# Altium PCB 激光昆虫蓝牙版  - 双面板 板厚1.0mm本.PcbDoc (part 2 of 2)
Units mil, origin at the board's own origin, x right, y up, seen from the top; angles counter-clockwise.
Board outline 2129 x 2216 mil, 3 copper layers (Top Layer, Mid-Layer 14, Bottom Layer); 82 components, 45 nets, 210 pads, 156 vias.
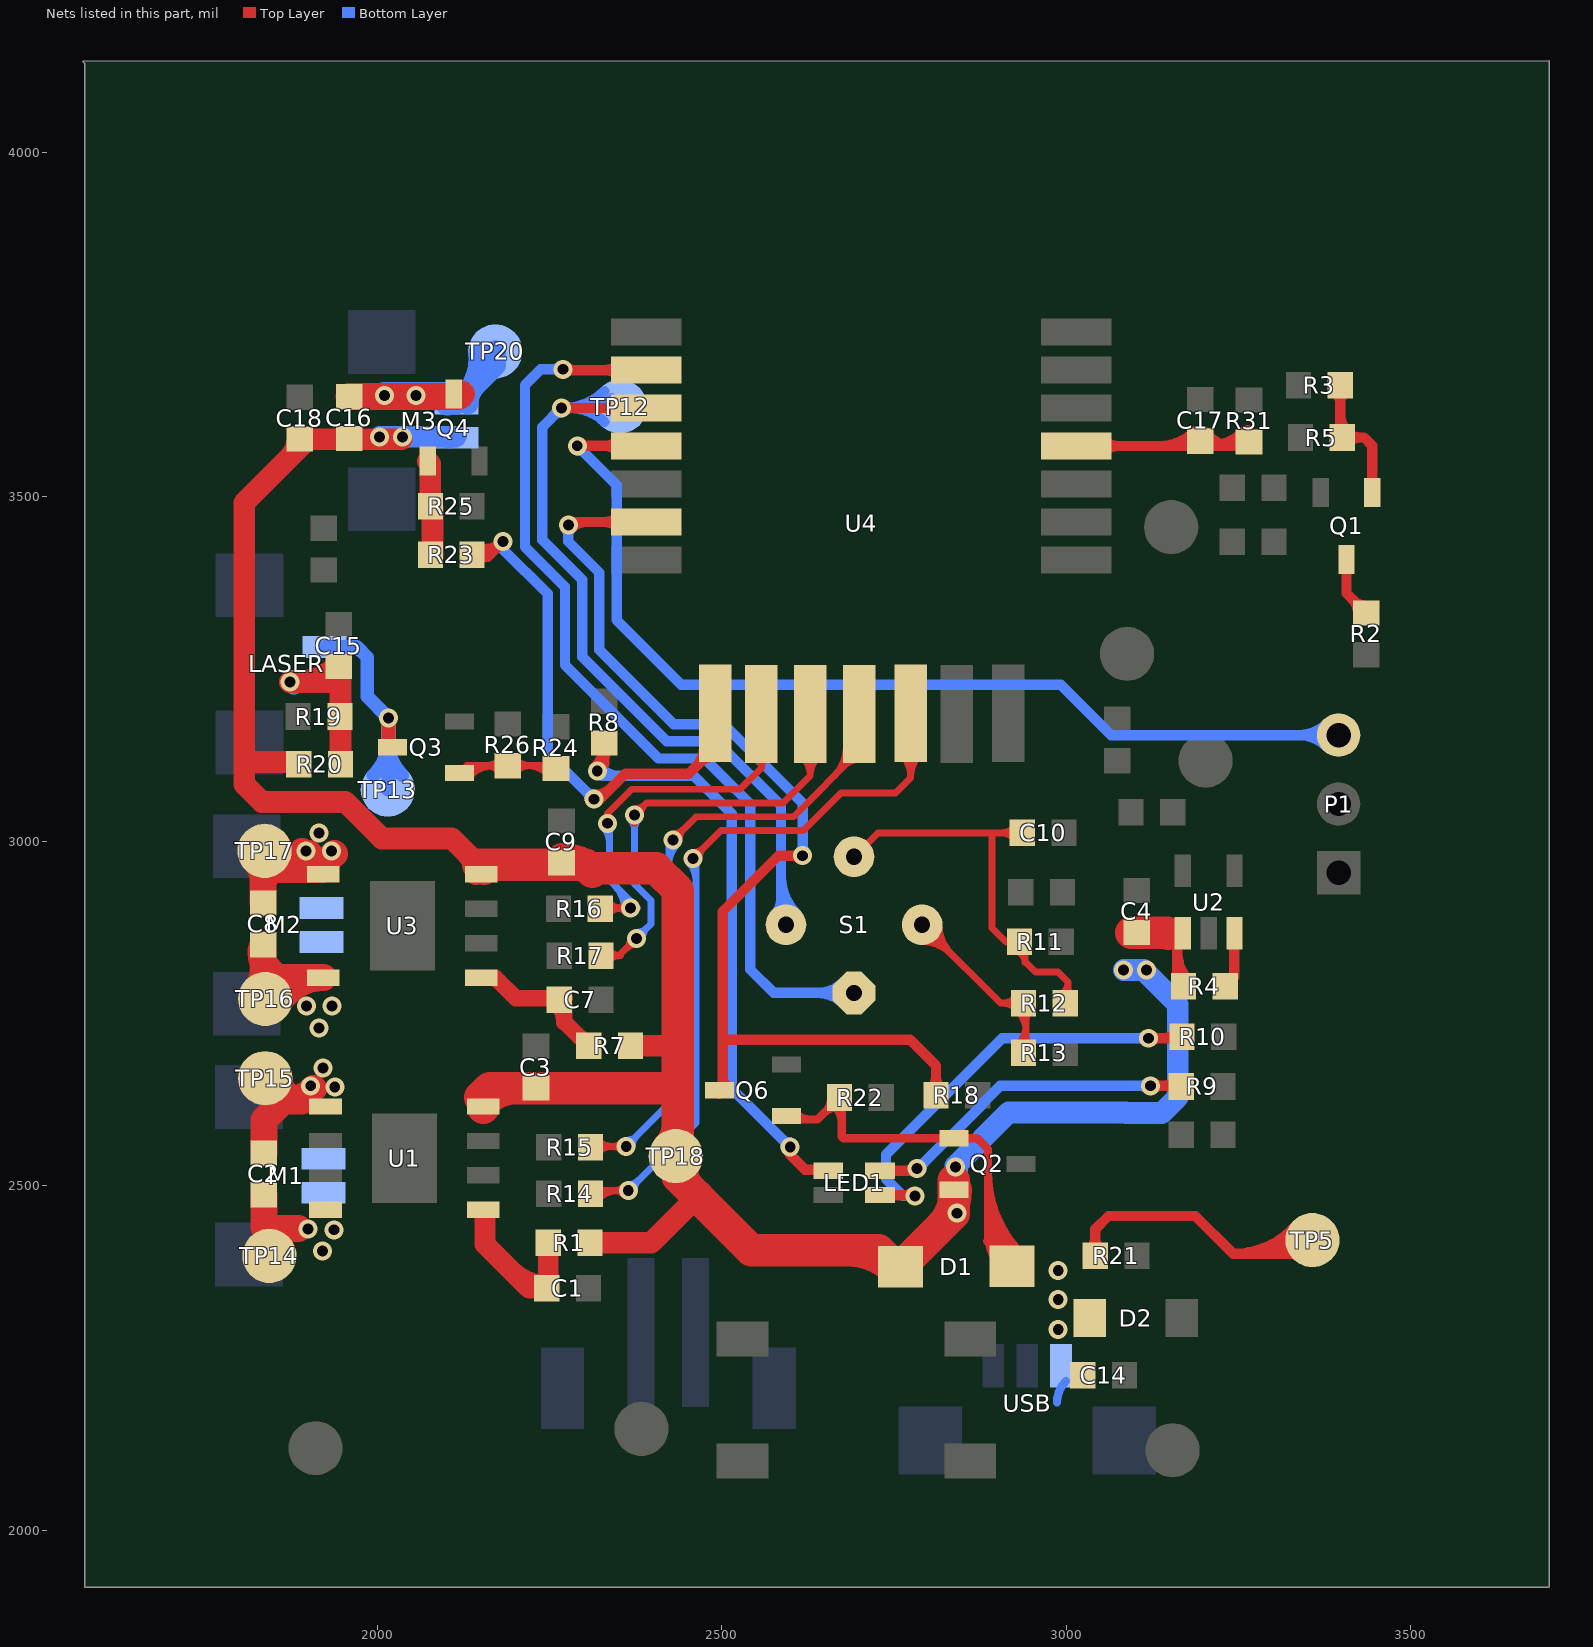
[diagram p2: the nets of this part, all layers, seen from the top]

## Via types
v1: diameter 27.56, hole 15.75, Top Layer to Bottom Layer, tented both sides, 156 vias

## Nets (pads, with @x,y where several pads share a name; then routed paths per layer and width w, separated by ;. In a path a pad name is that pad's centre, name@x,y a point inside that pad or via, vN(x,y) a via of type N, cw(c..) or ccw(c..) an arc to the next point about the centre after c; other vN are vias at no path point) (continued)
M3: R23.2 U4.8 | length 979.4
  Top Layer w15: R23.2@2135.71,3413.11 ccw(c2146.42,3438.88) 2166.15,3419.15 ; R23.2@2140.32,3413 2160,3413 ; R23.2@2141.46,3426.96 ccw(c2155.73,3461.27) v1(2182,3435) 2160,3413 ; R23.2@2144.96,3407.37 cw(c2158.54,3393.79) 2158.54,3413 ; R23.2@2146.58,3420.59 ccw(c2160,3428.67) 2160,3413 ; v1@2175.72,3435 cw(c2160.56,3435) 2171.28,3424.28 cw(c2182,3413.56) v1@2182,3428.72 ; v1@2314,3067.28 ccw(c2314,3103.92) 2339.91,3078.01 ; v1@2318,3058 2319.9,3058 2359.9,3098 2452,3098 2490.43,3136.43 U4.8@2490.43,3185.94 ; 2461.3,3107.3 ccw(c2429.91,3138.69) U4.8@2474.3,3138.69 ; 2466.77,3112.77 cw(c2490.43,3089.12) U4.8@2490.43,3122.57
  Bottom Layer w15: v1(2182,3435) 2182,3424 2247,3359 2247,3128 v1(2314,3061) ; v1@2307.72,3061 ccw(c2292.56,3061) 2303.28,3071.72 ccw(c2314,3082.44) v1@2314,3067.28
NetC1_1: C1.1 R1.2 U1.1 | length 277.9
  Top Layer w30: 2156,2453 2156,2415 2220,2351 C1.1@2245.68,2351 2247.68,2353 R1.2@2247.68,2417 ; 2194.51,2376.49 ccw(c2245.68,2427.66) C1.1@2245.68,2355.29
NetC7_1: C7.1 R7.2 U3.1 | length 281.3
  Top Layer w23.62: U3.1@2150.5,2802 2171,2802 2201,2772 C7.1@2271.68,2772 ; U3.1@2162.31,2802 cw(c2162.31,2781.02) 2177.14,2795.86 ; C7.1@2259.25,2764.26 cw(c2233.87,2737.03) 2271.1,2737.03 ; C7.1@2263.68,2770 2271.1,2762.58 2271.1,2737.9 2306,2703 R7.2@2306.68,2703 ; R7.2@2292.75,2716.25 ccw(c2306.68,2730.19) R7.2@2306.68,2710.48
NetC10_1: C10.1 R11.2 R12.1 S1.3 | length 713.8
  Top Layer w10: S1.3@2691.63,2977.48 2726.15,3012 2892,3012 ; R11.2@2919.34,2849.04 ccw(c2912,2846.1) 2912,2854 ; R11.2@2919.34,2858.96 cw(c2912,2861.9) 2912,2854 ; C10.1@2926.27,3002.59 ccw(c2903.56,2979.87) 2903.56,3012 ccw(c2903.56,3044.13) C10.1@2926.27,3021.41 ; R11.2@2927.78,2840.29 cw(c2922.83,2824.18) 2939.68,2824.18 ; C10.1@2935.68,3012 2892,3012 ; R12.1@2991.75,2777.56 ccw(c2981.48,2795.68) 3002.31,2795.68 ; R12.1@3002.31,2765 3002.31,2795.69 ; 3002.31,2788.45 ccw(c3020.78,2788.45) R12.1@3007.72,2775.39 ; 2892,3012 2892,2874 2912,2854 ; 2912,2854 2939.68,2854 2939.68,2825.32 2955,2810 2988,2810 3002.31,2795.69
NetC15_2: C15.2 LASER.1 R19.2 R20.2 | length 388.5
  Top Layer w31.5: v1(1873,3231) 1946.32,3231 ; v1@1882.07,3231 ccw(c1882.07,3314.63) C15.2@1941.21,3255.5 ; C15.2@1944,3253.69 1946.32,3251.37 1946.32,3231 ; R20.2@1946.32,3112 1946.32,3231
  Bottom Layer w31.5: v1@1874.82,3231 1876.64,3232.82 LASER.1@1922.87,3232.82 ; v1@1878.23,3229.04 cw(c1899.21,3180.17) 1906.73,3232.82 ccw(c1901.14,3174.6) v1@1878.45,3228.51
NetC16_1: C16.1 M3.2 Q4.3 TP20.1 | length 481.2
  Top Layer w39.37: C16.1@1959,3645.32 2117.86,3645.32 Q4.3@2121.48,3648.94
  Bottom Layer w31.5: M3.2@2114.87,3635.03 2171,3691.16 TP20.1@2171,3711 ; M3.2@2124.8,3644.95 ccw(c2069.03,3700.72) TP20.1@2147.5,3708.63 ; M3.2@2131.01,3635.03 cw(c2169.98,3635.03) 2142.43,3662.59
  Bottom Layer w39.37: v1(2010,3647) M3.2@2102.9,3647 ; 2079.34,3647 cw(c2079.34,3615.64) M3.2@2101.51,3637.81
  other v1: 2056,3647
NetCN6_2: LASER.2 Q3.3 TP13.1 | length 442
  Top Layer w20: Q3.3@2011.53,3137.76 ccw(c2000.74,3148.55) 2016,3148.55 ; v1(2016,3179) 2016,3142.54 Q3.3@2022.06,3136.48
  Bottom Layer w20: LASER.2@1922.87,3282.03 1969.97,3282.03 1985,3267 1985,3210 v1(2016,3179) 2016,3076 TP13.1@2015,3075 ; TP13.1@1994.23,3095.77 ccw(c1941.68,3148.32) 2016,3148.32 ; 2016,3143.49 ccw(c2083.49,3143.49) TP13.1@2035.77,3095.77
NetLED1_2: LED1.2 R10.2 | length 776.7
  Top Layer w15: LED1.2@2729.13,2486.3 2780.7,2486.3 v1@2781,2486 ; 2765.12,2486.3 cw(c2765.12,2470.12) v1@2776.56,2481.56 ; v1@2766.56,2486.3 ccw(c2766.56,2500.44) v1@2776.56,2490.44 ; v1(3119,2714) 3165.68,2714 R10.2@3167.68,2716 ; v1@3123.44,2709.56 cw(c3134.16,2698.84) 3134.16,2714 cw(c3134.16,2729.16) v1@3123.44,2718.44 ; 3139.14,2714 ccw(c3139.14,2743.56) R10.2@3160.04,2722.66 ; 3144.05,2714 cw(c3144.05,2691.38) R10.2@3160.04,2707.37
  Bottom Layer w15: v1@2776.56,2481.56 ccw(c2765.84,2470.84) 2765.84,2486 ccw(c2765.84,2501.16) v1@2776.56,2490.44 ; v1@2781,2486 2762,2486 2738,2510 2738,2545 2907,2714 v1(3119,2714) ; v1@3114.56,2709.56 ccw(c3103.84,2698.84) 3103.84,2714 ccw(c3103.84,2729.16) v1@3114.56,2718.44
  other v1: 2780,2485
NetLED1_3: LED1.3 R9.2 | length 617.4
  Top Layer w15: LED1.3@2729.13,2521.7 2781.7,2521.7 v1@2783,2523 ; 2764.7,2521.7 ccw(c2764.7,2541.3) v1@2778.56,2527.44 ; v1(3122,2645) 3165.68,2645 R9.2@3166.68,2644 ; v1@3126.44,2640.56 cw(c3137.16,2629.84) 3137.16,2645 cw(c3137.16,2660.16) v1@3126.44,2649.44 ; 3140.56,2645 cw(c3140.56,2618.86) R9.2@3159.04,2637.34 ; 3140.63,2645 ccw(c3140.63,2671.04) R9.2@3159.04,2652.63
  Bottom Layer w15: v1@2783,2523 2877,2617 2877,2618 2904,2645 v1(3122,2645) ; v1@2783,2529.28 ccw(c2783,2544.44) 2793.72,2533.72 ccw(c2804.44,2523) v1@2789.28,2523 ; v1@3117.56,2640.56 ccw(c3106.84,2629.84) 3106.84,2645 ccw(c3106.84,2660.16) v1@3117.56,2649.44
  other v1: 2783,2525
NetLED1_4: LED1.4 R8.2 | length 1006.5
  Top Layer w15: v1@2314.56,3106.44 ccw(c2279.7,3141.3) R8.2@2329,3141.3 ; v1(2319,3102) 2329,3112 R8.2@2329,3142.68 ; R8.2@2321.36,3135.04 cw(c2302.91,3116.59) 2329,3116.59 cw(c2355.09,3116.59) R8.2@2336.64,3135.04 ; v1(2599,2556) 2599,2545 2621,2523 2653.03,2523 LED1.4@2654.33,2521.7 ; 2630.96,2523 cw(c2630.96,2508.18) LED1.4@2641.44,2518.66
  Bottom Layer w15: v1(2319,3102) 2326,3095 2459,3095 2514.28,3039.72 2514.28,2640.72 v1(2599,2556) ; v1@2323.44,3106.44 ccw(c2351.06,3134.06) 2351.06,3095 ; v1@2592.72,2556 ccw(c2577.56,2556) 2588.28,2566.72 ccw(c2599,2577.44) v1@2599,2562.28
NetQ1_1: Q1.1 R3.1 R5.2 | length 316.5
  Top Layer w15: R3.1@3389.67,3653.37 cw(c3371.22,3634.93) 3397.31,3634.93 cw(c3423.4,3634.93) R3.1@3404.96,3653.37 ; R5.2@3392.67,3594.63 ccw(c3381.47,3605.83) 3397.31,3605.83 ; 3397.31,3620.32 ccw(c3433.65,3620.32) R5.2@3407.96,3594.63 ; R3.1@3397.31,3662 3397.31,3589 R5.2@3400.32,3586 3432,3586 3443.92,3574.08 Q1.1@3443.92,3506.31 ; R5.2@3407.96,3578.36 cw(c3426.41,3559.91) 3426.41,3586 cw(c3426.41,3612.09) R5.2@3407.96,3593.64
NetQ1_3: Q1.3 R2.2 | length 130.5
  Top Layer w15: Q1.3@3406.52,3409.06 3406.52,3359.8 R2.2@3435,3331.32 ; 3414.87,3351.44 cw(c3394.74,3331.32) R2.2@3423.21,3331.32 ; R2.2@3417.25,3349.07 ccw(c3434.02,3365.84) R2.2@3434.02,3342.12
NetQ3_1: Q3.1 R24.1 R26.2 | length 367.4
  Top Layer w10: Q3.1@2119.31,3099.08 2129.9,3109.67 2262.98,3109.67 R24.1@2266,3112.69 ; Q3.1@2126.3,3101.33 cw(c2146.43,3081.21) 2146.43,3109.67 ; Q3.1@2133.38,3094.26 cw(c2170.57,3057.07) R26.2@2170.57,3109.67 ; 2155.85,3109.67 ccw(c2155.85,3141.85) R26.2@2178.61,3119.09 ; 2155.93,3109.67 cw(c2155.93,3077.59) R26.2@2178.61,3100.27 ; R26.2@2199.39,3100.27 cw(c2222.07,3077.59) 2222.07,3109.67 ; R26.2@2199.39,3119.09 ccw(c2222.15,3141.85) 2222.15,3109.67 ; 2216.27,3109.67 cw(c2216.27,3063.94) R24.1@2248.61,3096.28 ; 2235.51,3109.67 ccw(c2235.51,3128.2) R24.1@2248.61,3115.1
NetQ4_1: Q4.1 R23.1 R25.2 | length 141.4
  Top Layer w31.5: Q4.1@2073.08,3551.69 2076.68,3548.09 R25.2@2076.68,3486 2079.69,3483 R23.1@2079.69,3413
NetR4_2: R4.2 U2.3 | length 82.4
  Top Layer w15: R4.2@3230.39,2789.62 3243.8,2803.04 U2.3@3243.8,2866.45
NetR12_2: R12.2 R13.1 S1.2 | length 806.5
  Top Layer w10: 2853.11,2816 S1.2@2790.46,2878.65 2904.11,2765 2941.68,2765 R13.1@2941.68,2693 ; R12.2@2928.27,2754.61 cw(c2895.9,2722.23) 2941.68,2722.23 ; R12.2@2928.27,2755.59 ccw(c2905.56,2732.87) 2905.56,2765 ccw(c2905.56,2797.13) R12.2@2928.27,2774.41 ; R13.1@2928.28,2703.39 ccw(c2895.91,2735.76) 2941.68,2735.76 ; 2941.68,2716.46 ccw(c2960.16,2716.46) R13.1@2947.1,2703.39 ; 2941.68,2741.55 cw(c2960.15,2741.55) R12.2@2947.09,2754.61 ; 2815.26,2853.85 cw(c2840.06,2878.65) 2804.98,2878.65 ccw(c2840.06,2878.65) 2815.26,2853.85 ; 2815.26,2853.85 ccw(c2790.46,2829.05) 2790.46,2864.12 cw(c2790.46,2829.05) 2815.26,2853.85 ; 2832.33,2836.78 cw(c2874.2,2878.65) 2814.98,2878.65 ccw(c2874.2,2878.65) 2832.33,2836.78 ; 2832.33,2836.78 ccw(c2790.46,2794.91) 2790.46,2854.12 cw(c2790.46,2794.91) 2832.33,2836.78
NetR14_1: R14.1 U4.12 | length 1288.7
  Top Layer w10: R14.1@2309.31,2488 2314.31,2493 v1(2364,2493) ; R14.1@2318.72,2479.57 cw(c2351.14,2447.16) v1@2351.14,2493 ; R14.1@2318.72,2498.39 ccw(c2331.75,2511.42) 2331.75,2493 ; v1@2357.79,2486.79 ccw(c2342.8,2471.8) 2342.8,2493 ccw(c2342.8,2514.2) v1@2357.79,2499.21 ; v1(2458,2975) 2498.5,3015.5 2618.5,3015.5 2673,3070 2752,3070 2773.89,3091.89 U4.12@2773.89,3185.94 ; v1@2458,2983.78 ccw(c2458,3004.98) 2472.99,2989.99 ccw(c2487.98,2975) v1@2466.78,2975 ; U4.12@2760.72,3125.53 cw(c2728.93,3093.74) 2773.89,3093.74 cw(c2818.85,3093.74) U4.12@2787.06,3125.53
  Bottom Layer w10: v1(2364,2493) 2462,2591 2462,2972 v1@2458,2976 ; v1@2364,2501.78 ccw(c2364,2522.98) 2378.99,2507.99 ccw(c2393.98,2493) v1@2372.78,2493 ; v1@2451.79,2968.79 cw(c2427.15,2944.15) 2462,2944.15
NetR15_1: R15.1 U4.11 | length 1203.2
  Top Layer w10: R15.1@2309.31,2556 2310.31,2557 v1(2361,2557) ; R15.1@2318.72,2547.57 cw(c2341.48,2524.82) 2341.48,2557 ; R15.1@2318.72,2566.39 ccw(c2341.4,2589.07) 2341.4,2557 ; v1@2354.79,2550.79 ccw(c2339.8,2535.8) 2339.8,2557 ccw(c2339.8,2578.2) v1@2354.79,2563.21 ; v1(2429,3002) 2462.5,3035.5 2603.5,3035.5 2699.02,3131.02 U4.11@2699.02,3184.61 ; v1@2429,3010.78 ccw(c2429,3031.98) 2443.99,3016.99 ccw(c2458.98,3002) v1@2437.78,3002 ; 2662.75,3094.75 ccw(c2620.14,3137.36) U4.11@2680.4,3137.36 ; 2678.05,3110.05 cw(c2699.02,3089.09) U4.11@2699.02,3118.74 ; 2679.82,3111.82 ccw(c2654.28,3137.36) U4.11@2690.4,3137.36
  Bottom Layer w10: v1@2360.22,2557.78 v1(2361,2557) 2442,2638 2442,2932.34 2423,2951.34 2423,3005 v1@2422,3006 ; v1@2361,2565.78 ccw(c2361,2586.98) 2375.99,2571.99 ccw(c2390.98,2557) v1@2369.78,2557 ; 2423,2966.32 cw(c2464.68,2966.32) v1@2435.21,2995.79
NetR16_1: R16.1 U4.9 | length 752.1
  Top Layer w10: v1@2330.04,3033.83 ccw(c2326.77,3040.28) 2334,3040.28 ; v1@2332,3024 v1(2334,3026) 2334,3040.28 ; R16.1@2332.72,2893.57 cw(c2355.48,2870.82) v1@2355.48,2903 ; R16.1@2332.72,2912.39 ccw(c2355.4,2935.07) v1@2355.4,2903 ; R16.1@2333.31,2902 2334.31,2903 v1@2377,2903 ; v1@2337.96,3033.83 cw(c2341.23,3040.28) 2334,3040.28 ; v1@2360.79,2896.79 ccw(c2345.8,2881.8) 2345.8,2903 ccw(c2345.8,2924.2) v1@2360.79,2909.21 ; U4.9@2548.51,3120.94 cw(c2540.68,3106.29) 2557.29,3106.29 ; U4.9@2557.29,3184.61 2557.29,3106.29 ; U4.9@2566.07,3120.94 ccw(c2573.9,3106.29) 2557.29,3106.29 ; 2334,3040.28 2369.22,3075.5 2526.5,3075.5 2557.29,3106.29
  Bottom Layer w10: v1@2327.79,3019.79 cw(c2306.77,2998.77) 2336.5,2998.77 ; v1(2334,3026) 2336.5,3023.5 2336.5,2943.5 v1@2377,2903 ; 2336.5,3010.84 cw(c2349.16,3010.84) v1@2340.21,3019.79 ; 2344.94,2935.06 cw(c2312.88,2903) v1@2358.22,2903 ; 2362.01,2917.99 cw(c2347.02,2903) v1@2368.22,2903
  other v1: 2367,2903
NetR17_1: R17.1 U4.10 | length 868.5
  Top Layer w10: R17.1@2324.31,2834 2353,2834 ; R17.1@2334.47,2825.41 cw(c2353,2809.74) 2353,2834 ; R17.1@2334.47,2842.59 ccw(c2353,2858.26) 2353,2834 ; v1@2367.22,2859 cw(c2346.02,2859) 2361.01,2844.01 cw(c2376,2829.02) v1@2376,2850.22 ; v1@2373,3026 v1(2373,3038) 2390.5,3055.5 2588.5,3055.5 2628.16,3095.16 ; v1@2373,3046.78 ccw(c2373,3067.98) 2387.99,3052.99 ccw(c2402.98,3038) v1@2381.78,3038 ; v1(2376,2859) 2353,2836 2353,2834 ; U4.10@2615.61,3123.61 cw(c2589.65,3095.16) 2628.16,3095.16 ; U4.10@2628.16,3184.61 2628.16,3095.16 ; U4.10@2640.71,3123.61 ccw(c2666.67,3095.16) 2628.16,3095.16
  Bottom Layer w10: v1@2366.79,3031.79 cw(c2351.8,3016.8) 2373,3016.8 cw(c2394.2,3016.8) v1@2379.21,3031.79 ; v1@2373,3026 2373,2937.7 2397,2913.7 2397,2880 v1(2376,2859) ; v1@2376,2867.78 ccw(c2376,2888.98) 2390.99,2873.99 ccw(c2405.98,2859) v1@2384.78,2859
OUT1A: C2.1 M1.1 TP14.1 U1.8 | length 190.8
  Top Layer w39.37: 1835,2464.84 ccw(c1909.84,2464.84) TP14.1@1856.92,2411.92 ; C2.1@1835,2486.68 1835,2447 ; TP14.1@1853.16,2414.86 cw(c1872.52,2447) 1835,2447 ; 1885,2438 1844,2438 1835,2447
  other v1: 1920,2405 1937,2436 1899,2437
OUT1B: C2.2 M1.2 TP15.1 U1.5 | length 214.2
  Top Layer w39.37: C2.2@1835,2547.31 1835,2595 1863,2623 1890,2623 cw(c1890,2656.31) TP15.1@1856.68,2656.12 ; 1864.14,2623 ccw(c1864.14,2683.86) v1@1907.18,2640.82
  other v1: 1938,2643 1903,2645 1921,2671
OUT2A: C8.1 M2.1 TP16.1 U3.8 | length 387.3
  Top Layer w39.37: C8.1@1833.74,2850.27 ccw(c1860.85,2837.52) 1839.67,2816.33 ; 1834,2825.77 ccw(c1891.77,2825.77) TP16.1@1850.92,2784.92 ; C8.1@1834,2849.68 1834,2822 ; TP16.1@1850.18,2785.62 cw(c1882.98,2822) 1834,2822 ; TP16.1@1854.37,2761.73 cw(c1921.5,2725.91) U3.8@1921.5,2802 1854,2802 1834,2822 ; TP16.1@1823.08,2784.92 ccw(c1796.72,2811.28) 1834,2811.28 cw(c1796.72,2811.28) TP16.1@1823.08,2784.92
  other v1: 1915,2729 1897,2761 1934,2761
OUT2B: C8.2 M2.2 TP17.1 U3.5 | length 509.1
  Top Layer w20: 1834,2944 TP17.1@1842,2952
  Top Layer w39.37: TP17.1@1822.08,2972.08 cw(c1793.3,2943.3) 1834,2943.3 ; TP17.1@1822.23,2971.93 cw(c1794.86,2943.95) 1834,2943.95 cw(c1865.92,2943.95) TP17.1@1847.41,2969.96 ; C8.2@1834,2910.31 1834,2944 ; 1834,2933.65 cw(c1888.35,2933.65) TP17.1@1849.92,2972.08 ; TP17.1@1842,2959 U3.5@1921.5,2959 ; TP17.1@1845.07,2959 ccw(c1845.07,3036.93) v1@1900.18,2981.82 ; TP17.1@1852.56,2996.64 ccw(c1921.5,3040.94) U3.5@1921.5,2959 ; 1882.07,2959 ccw(c1882.07,3036.93) v1@1937.18,2981.82 ; v1@1890.2,2984.89 ccw(c1921.5,2990.86) U3.5@1921.5,2959
  other v1: 1896,2986 1933,2986 1915,3012
PIR: S1.4 TP12.1 U4.3 | length 1551.5
  Top Layer w15: v1(2267,3629) 2267.24,3628.76 U4.3@2390,3628.76 ; v1@2271.44,3624.56 cw(c2281.59,3614.41) 2281.59,3628.76 ; v1@2271.44,3633.44 ccw(c2282.73,3644.73) 2282.73,3628.76 ; U4.3@2349.89,3620.15 ccw(c2329.09,3599.35) 2329.09,3628.76 ccw(c2329.09,3658.18) U4.3@2349.89,3637.38
  Bottom Layer w15: v1@2260.72,3629 cw(c2245.56,3629) 2256.28,3618.28 cw(c2267,3607.56) v1@2267,3622.72 ; v1@2270.23,3629 ccw(c2270.23,3712.77) TP12.1@2329.46,3653.54 ; v1@2271.44,3624.56 cw(c2282.16,3613.84) 2282.16,3629 cw(c2282.16,3644.16) v1@2271.44,3633.44 ; v1@2279.89,3629 cw(c2279.89,3558.89) TP12.1@2329.46,3608.46 ; 2306.44,3629 ccw(c2306.44,3676.56) TP12.1@2340.07,3642.93 ; TP12.1@2352,3631 2350,3629 v1(2267,3629) 2239,3601 2239,3437.71 2297,3379.71 2297,3267.64 2419.64,3145 2492,3145 2585.72,3051.28 2585.72,2885.73 S1.4@2592.8,2878.65 ; S1.4@2577.22,2894.23 ccw(c2556.71,2914.74) 2585.72,2914.74 ; 2585.72,2912.71 ccw(c2626.86,2912.71) S1.4@2597.77,2883.62 ; 2585.72,2948.92 ccw(c2663.07,2948.92) S1.4@2608.38,2894.23
PIR_CON: S1.1 U4.2 | length 1542
  Top Layer w15: v1(2269,3685) 2270.12,3683.88 U4.2@2390,3683.88 ; v1@2273.44,3689.44 ccw(c2286.86,3702.86) 2286.86,3683.88 ; U4.2@2349.89,3675.27 ccw(c2329.09,3654.46) 2329.09,3683.88 ccw(c2329.09,3713.3) U4.2@2349.89,3692.5
  Bottom Layer w15: v1@2264.56,3680.56 ccw(c2253.84,3669.84) 2253.84,3685 ccw(c2253.84,3700.16) v1@2264.56,3689.44 ; v1(2269,3685) 2237,3685 2214,3662 2214,3427.36 2272,3369.36 2272,3256 2408,3120 2475,3120 2499,3096 2541,3054 2541,2813.82 2575,2779.82 S1.1@2691.63,2779.82 ; S1.1@2676.05,2764.25 ccw(c2638.45,2726.65) 2638.45,2779.82 ccw(c2638.45,2833) S1.1@2676.05,2795.4
RESET: C17.2 R31.2 U4.18 | length 562.7
  Top Layer w15: U4.18@3013.98,3573.58 3239.9,3573.58 ; U4.18@3054.1,3564.97 cw(c3074.9,3544.17) 3074.9,3573.58 cw(c3074.9,3603) U4.18@3054.1,3582.2 ; 3135.29,3573.58 ccw(c3135.29,3644.41) C17.2@3185.37,3594.33 ; 3171.5,3573.58 ccw(c3171.5,3608.2) C17.2@3195.98,3583.72 ; C17.2@3179.06,3575.97 ccw(c3183.55,3578.99) C17.2@3183.55,3573.58 ; C17.2@3191.51,3584.34 ccw(c3211.72,3597.95) C17.2@3211.72,3573.58 ; C17.2@3203.95,3592.72 ccw(c3239.9,3616.91) 3239.9,3573.58 ; C17.2@3206.3,3573.58 ccw(c3206.3,3644.4) R31.2@3256.37,3594.33 ; 3242.51,3573.58 ccw(c3242.51,3608.19) R31.2@3266.98,3583.72 ; R31.2@3253.21,3586.78 cw(c3239.9,3586.89) 3239.9,3573.58 ; R31.2@3263,3596.68 3239.9,3573.58
SWS: P1.3 U4.4 | length 1678.7
  Top Layer w15: v1(2290,3574) 2389.52,3574 U4.4@2389.94,3573.58 ; v1@2294.44,3569.56 cw(c2305.16,3558.84) 2305.16,3574 cw(c2305.16,3589.16) v1@2294.44,3578.44 ; 2328.02,3574 cw(c2328.02,3543.16) U4.4@2349.82,3564.97 ; 2330.03,3574 ccw(c2330.03,3601.99) U4.4@2349.82,3582.2
  Bottom Layer w15: v1@2290,3567.72 cw(c2290,3552.56) 2300.72,3563.28 cw(c2311.44,3574) v1@2296.28,3574 ; v1(2290,3574) 2347,3517 2347,3321 2441,3227 2992,3227 3065,3154 P1.3@3395,3154 ; P1.3@3378.03,3137.03 ccw(c3337.07,3096.07) 3337.07,3154 ccw(c3337.07,3211.93) P1.3@3378.03,3170.97
USB_DEC: Q6.3 R18.2 U4.6 | length 1764.9
  Top Layer w15: v1(2277,3459) 2281.41,3463.41 U4.6@2390,3463.41 ; v1@2281.44,3454.56 cw(c2302.81,3433.19) 2302.81,3463.41 ; U4.6@2349.89,3454.79 ccw(c2329.09,3433.99) 2329.09,3463.41 ccw(c2329.09,3492.83) U4.6@2349.89,3472.03 ; Q6.3@2496.06,2633.48 2501,2638.42 2501,2712 ; 2501,2659.3 ccw(c2526.14,2659.3) Q6.3@2508.36,2641.53 ; v1@2612.56,2974.56 ccw(c2601.84,2963.84) 2601.84,2979 ccw(c2601.84,2994.16) v1@2612.56,2983.44 ; v1(2617,2979) 2582,2979 2501,2898 2501,2712 ; R18.2@2803.04,2639.63 ccw(c2784.59,2658.07) 2810.68,2658.07 ccw(c2836.77,2658.07) R18.2@2818.33,2639.63 ; R18.2@2810.68,2631 2810.68,2674.32 2773,2712 2501,2712
  Bottom Layer w15: v1@2272.56,3454.56 cw(c2261.84,3443.84) 2277,3443.84 cw(c2292.16,3443.84) v1@2281.44,3454.56 ; v1(2277,3459) 2277,3435.07 2322,3390.07 2322,3278 2430,3170 2502.36,3170 2617,3055.36 v1(2617,2979) ; v1@2612.56,2983.44 ccw(c2601.84,2994.16) 2617,2994.16 ccw(c2632.16,2994.16) v1@2621.44,2983.44
VBUS: C14.1 D1.1 D2.2 Q2.1 Q6.1 R21.2 R22.1 TP5.1 USB.1 | length 1885.5
  Top Layer w12: Q6.1@2593.31,2596.08 2638.76,2596.08 R22.1@2670.69,2628 2674,2624.69 2674,2571 2676.08,2568.92 Q2.1@2836.69,2568.92 2870.08,2568.92 2886,2553 2886,2418.06 D1.1@2921.06,2383 ; Q6.1@2606.67,2605.19 ccw(c2628.66,2627.18) 2628.66,2596.08 ; 2648,2605.31 cw(c2670.69,2582.62) R22.1@2670.69,2614.71 ; 2650.37,2607.69 ccw(c2631.04,2627.02) R22.1@2658.38,2627.02 ; R22.1@2661.98,2618.31 cw(c2632.97,2589.3) 2674,2589.3 ; 2674,2605.3 cw(c2692.4,2605.3) R22.1@2679.39,2618.31 ; Q2.1@2823.33,2564.81 ccw(c2813.41,2554.89) 2813.41,2568.92 ccw(c2813.41,2582.95) Q2.1@2823.33,2573.03 ; Q2.1@2850.05,2564.81 cw(c2859.97,2554.89) 2859.97,2568.92 cw(c2859.97,2582.95) Q2.1@2850.05,2573.03 ; 2886,2433.26 ccw(c2968.96,2433.26) D1.1@2910.3,2374.59 ; 2886,2462.23 ccw(c2997.93,2462.23) D1.1@2918.78,2383.08 ; 2886,2491.2 ccw(c3026.9,2491.2) D1.1@2927.27,2391.56 ; 2886,2520.17 ccw(c3055.87,2520.17) D1.1@2935.76,2400.05 ; D1.1@2894.95,2387.17 ccw(c2859.05,2393.47) 2884.82,2419.24 ccw(c2914.43,2448.84) D1.1@2917.14,2407.06
  Top Layer w15: R21.2@3034.04,2406.63 ccw(c3015.59,2425.07) 3041.68,2425.07 ccw(c3067.77,2425.07) R21.2@3049.33,2406.63 ; R21.2@3041.68,2398 3041.68,2436.68 3061,2456 3187,2456 3242,2401 ; 3275.26,2401 ccw(c3275.26,2493.17) TP5.1@3344.35,2432.17 ; 3308.51,2401 ccw(c3308.51,2463.81) TP5.1@3355.6,2422.24 ; TP5.1@3333.11,2442.09 cw(c3242.01,2522.53) 3242.01,2401 ; TP5.1@3357,2421 3337,2401 3242,2401
  Bottom Layer w12: 2986.2,2185.13 cw(c3030.18,2185.13) USB.1@2999.08,2216.23
  other v1: 2988,2291 2988,2335 2988,2377
VBUS_BAT: C3.1 C4.2 C9.1 C16.2 C18.2 D1.2 M3.1 Q2.2 R1.1 R4.1 R7.1 R20.1 TP18.1 U1.4 U2.1 U3.4 | length 4356.2
  Top Layer w15: 3161,2837.84 ccw(c3216.99,2837.84) R4.1@3177.4,2798.25 ; U2.1@3161,2866.45 3161,2798.38 R4.1@3169.76,2789.62
  Top Layer w23.62: 2356,2641.68 2359.31,2645
  Top Layer w31.5: 1822,3115 1882.69,3115 R20.1@1885.69,3112 ; 1872.69,3557.69 ccw(c1846.69,3583.69) C18.2@1883.46,3583.69 ; v1@2035,3583.69 1898.69,3583.69 1806.5,3491.5 1806.5,3082.5 1832,3057 1953,3057 2006,3004 2064,3004 2107.68,3004 2146,2965.68 ; 2130.56,2981.12 cw(c2101.44,2952) U3.4@2142.63,2952 ; R1.1@2308.31,2417 2397,2417 2464.5,2484.5 ; R7.1@2367.31,2703 2436,2703
  Top Layer w47.24: 2146,2965.68 2302,2965.68 2307.09,2960.6 2404.4,2960.6 2436,2929 2436,2703 2436,2641.68 ; 2149,2628 2162.68,2641.68 ; U1.4@2153.69,2612.88 cw(c2185.66,2618.7) 2162.68,2641.68 ; U3.4@2153.96,2960.35 cw(c2166.83,2947.48) 2166.83,2965.68 ; U1.4@2156.96,2623.35 cw(c2201.22,2579.09) 2201.22,2641.68 ; TP18.1@2421.86,2554.14 ccw(c2387.74,2588.26) 2436,2588.26 ; TP18.1@2446.49,2534.88 ccw(c2472.32,2519.32) 2451,2498 ; 2682.7,2406.15 cw(c2682.7,2308) D1.2@2752.11,2377.4 ; 2816.67,2439.6 ccw(c2762.16,2494.12) Q2.2@2839.25,2494.12 ; 2836.69,2508 Q2.2@2836.69,2494.12 2836.69,2459.63 D1.2@2759.06,2382 2751.62,2382 2727.47,2406.15 2542.85,2406.15 2464.5,2484.5 2436,2513 2436,2641.68 ; C4.2@3094,2867.31 3146.38,2867.31 3148.07,2865.62 ; 2162.68,2641.68 C3.1@2230,2641.68 2356,2641.68 2436,2641.68 ; C9.1@2267.98,2974 cw(c2267.98,2911.95) 2311.86,2955.83 ccw(c2267.98,2911.95) C9.1@2267.98,2974
  Bottom Layer w23.62: v1@2839,2524 v1@2841,2522
  Bottom Layer w31.5: v1(2003,3587) M3.1@2113.69,3587 ; M3.1@2102.69,3587 M3.1@2103.87,3585.82 ; v1@2839,2524 2839,2528.82 2916.55,2606.37 3086,2606.37 3086.9,2605.47 3138.37,2605.47 3161.53,2628.63 3161.53,2763.47 3112,2813 v1(3083,2813) ; v1@2841,2468 v1@2841,2522
  other v1: 2841,2460 2839,2527 3116,2813 2036,3587
pads on no net: U2.4 U4.5 U4.21

## Polygon pours and split planes (outlines as drawn)
GND on Top Layer "Bottom Layer-No Net" (solid, remove dead copper): 1882.47,3740.08 1883.4,3741 3504,3741 3504,3740.72 3562,3682.72 3562,2089.94 3483.26,2011.2 3482.88,2011.58 1807.52,2011.58 1807.52,2017.26 1728.78,2096 1728.78,3586.38
GND on Bottom Layer "Bottom Layer-No Net" (solid, remove dead copper): 1884.9,3742.51 3501.79,3742.51 3501.89,3742.41 3561.57,3682.72 3562,3682.72 3562,2089.94 3557.91,2085.85 3483.26,2011.2 3111.38,2011.2 3111,2011.58 3111,2275 3111,2418 2293,2418 2293,2013.58 2291,2011.58 1807.52,2011.58 1728.78,2090.32 1728.78,2334 1976,2334 1986,2344 1986,3219 1986,3474 1984,3476 1985,3477 2179,3477 2179,3685 2178,3686 2164,3700 1840,3700 1842.4,3700 1884.85,3742.46

## Keep-outs
Keep-Out Layer:
  circle w1: c2103.04,2268.29 r51.18
  circle w1: c3283.9,2267.49 r51.18
  circle w1: c2102.8,3291.11 r51.18
  circle w1: c3283.9,3291.11 r51.18
  lines w1: 3483.26,2011.2 3562,2089.94 3562,3682.72 ; 3483.26,2011.58 1807.52,2011.58 1728.78,2090.32 1728.78,3586.38 2083.11,3940.71 3303.58,3940.71 3561.79,3682.51

## Other copper
Top Layer:
  rectangle net GND: 3195,2889 3218,3024.43
  rectangle net BAT+: 2913,2464 2963,2569
  rectangle net VBUS: 2971,2181 3008,2414
  rectangle net VBUS: 2972,2207 3042,2413
  rectangle net OUT1A: 1887,2388 1950,2477
  rectangle net OUT1B: 1888,2601 1952,2688
  rectangle net OUT2B: 1883,2941 1944,3027
  rectangle net OUT2A: 1883,2712 1945,2813
  rectangle net GND: 1901,2502 2017,2576
  rectangle net GND: 1898,2840 2022,2914
  rectangle net VBUS: 2891.12,2353 3034,2412.94
  rectangle net VBUS_BAT: 3072,2799 3122,2869
Bottom Layer:
  rectangle net BAT+: 2878,2198 2909,2275
  rectangle net GND: 2663,2042 2745,2326
  rectangle net GND: 2516,2186 2651,2243
  rectangle net GND: 2616,2044 2668,2313
  rectangle net GND: 2535,2313 2668,2411
  rectangle net GND: 3129,3120 3171.61,3131.06
  rectangle net BAT+: 2427,2450 2679,2479
  rectangle net BAT+: 2381,2102 2415,2450
  rectangle net GND: 3062,2047 3111,2120
  rectangle net GND: 2782,2042 2829,2132
  rectangle net GND: 2564,2052 2595,2192
  rectangle net GND: 2252,2093 2283,2322
  rectangle net GND: 2442,2049 2535,2411
  rectangle net GND: 2293,2027.38 3213,2076.38
  rectangle net GND: 2926,2023 2960,2269
  rectangle net VBUS: 2971,2179 3008,2395
  rectangle net OUT2A: 1883,2713 1947,2868
  rectangle net OUT2B: 1882,2886 1946,3026
  rectangle net OUT1B: 1887,2523 1951,2688
  rectangle net OUT1A: 1887,2388 1951,2505

## Silkscreen, mask and mechanical layers (free items; w line width, h text height)
Top Overlay:
  circle w1: c2693.35,2188.75 r59.06
  circle w10: c2692,2878 r108.63
  lines w1: 2413.82,2877.72 2693.35,2877.72 ; 2693.35,2170.9 2693.35,2877.72 ; 2693.35,3157.25 2693.35,2877.72 ; 2972.87,2877.72 2693.35,2877.72 ; 2575.24,2070.64 2575.24,2306.86 2811.46,2306.86 2811.46,2070.64 2575.24,2070.64 ; 2644.13,2464.34 2644.13,2543.08 2742.56,2543.08 2742.56,2464.34 2644.13,2464.34
  text "3V3" at 3181,3173 h30
  text "SWS" at 3466,3150 h30
  text "GND" at 3462,3042 h30
  text "3V3" at 3460,2942 h30
  text "VBUS" at 3420,2413 h30
  text "BAT+" at 2225,2127 h30
  text "GND" at 3207,2105 h30
  text "GND" at 1774,2103 h30
Bottom Overlay:
  circle w1: c3282.57,3292 r98.43
  circle w1: c3281.57,2265 r98.43
  circle w1: c2100.57,2271 r98.43
  circle w1: c2101.57,3292 r98.43
  text "G" at 4870,4119 h30
  text "+" at 1955,3178 h30
  text "V" at 5975,2814 h30
  text "-" at 2498,2357 h30
  text "+" at 2311,2348 h30
  text "+" at 2866,2301 h30
  text "VBUS" at 3136,2300 h30
  text "G" at 2938,2296 h30